# EAGLE board Top (EAGLE 6.3)
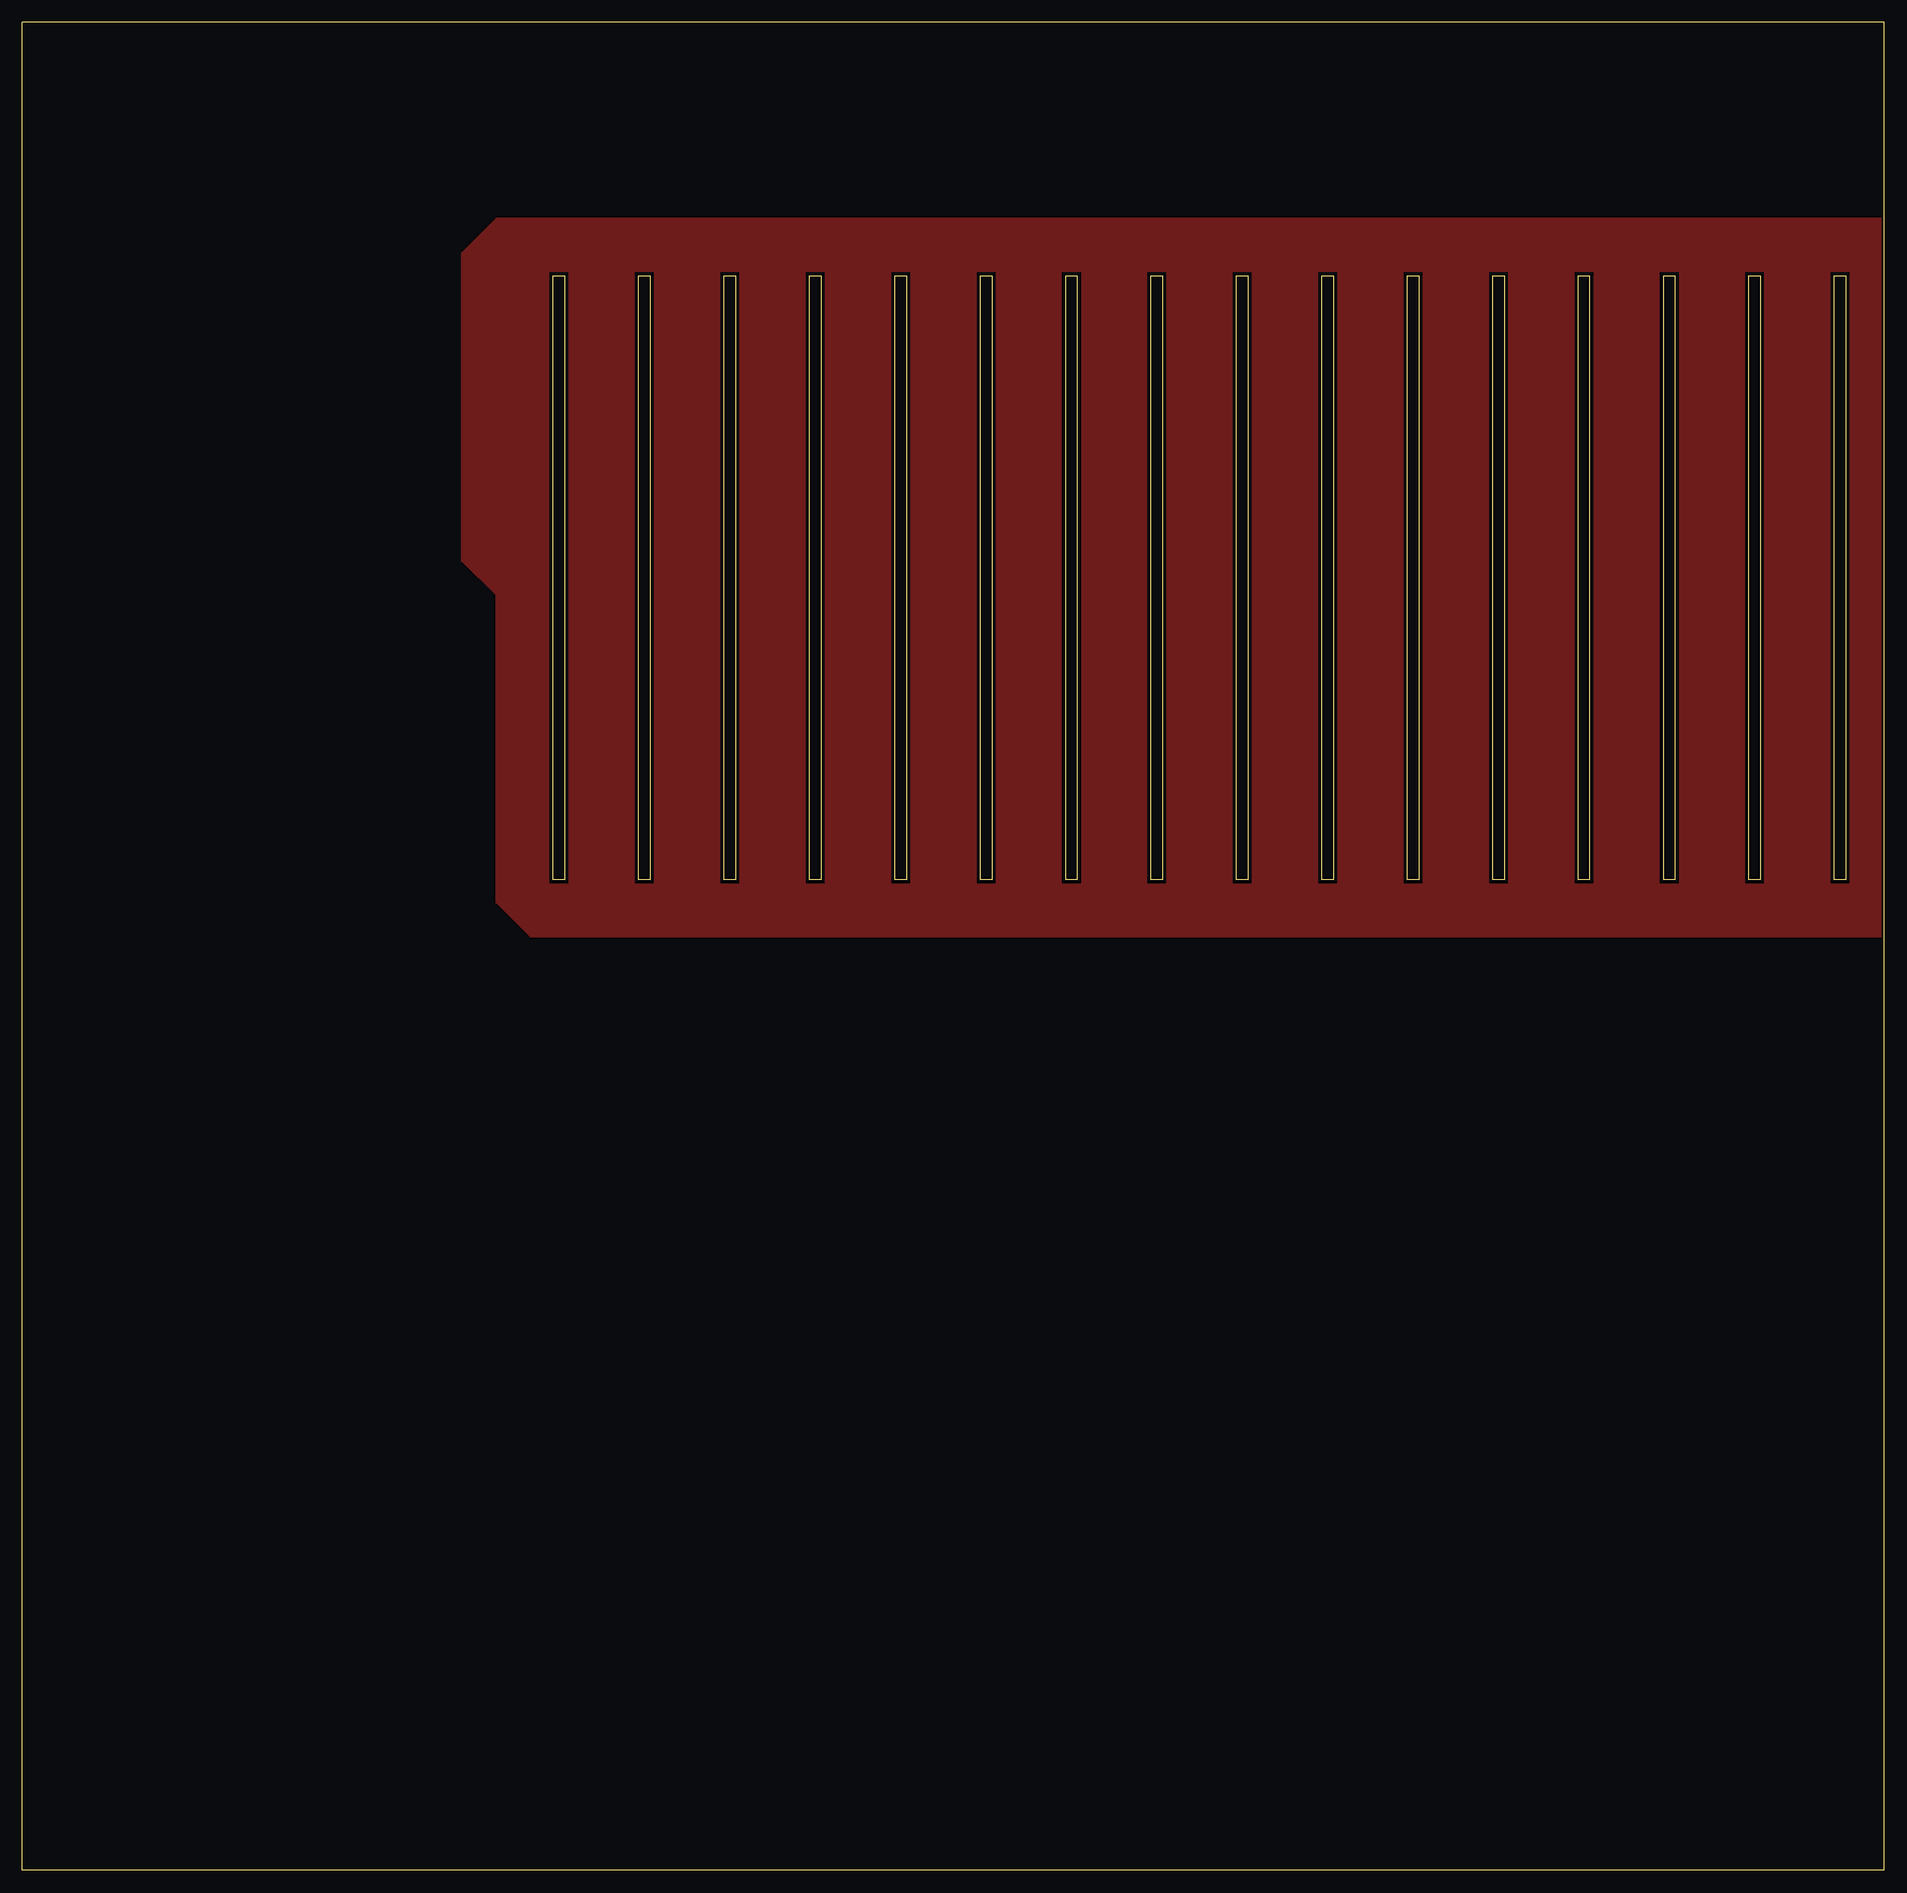
[diagram p0: board, top side]
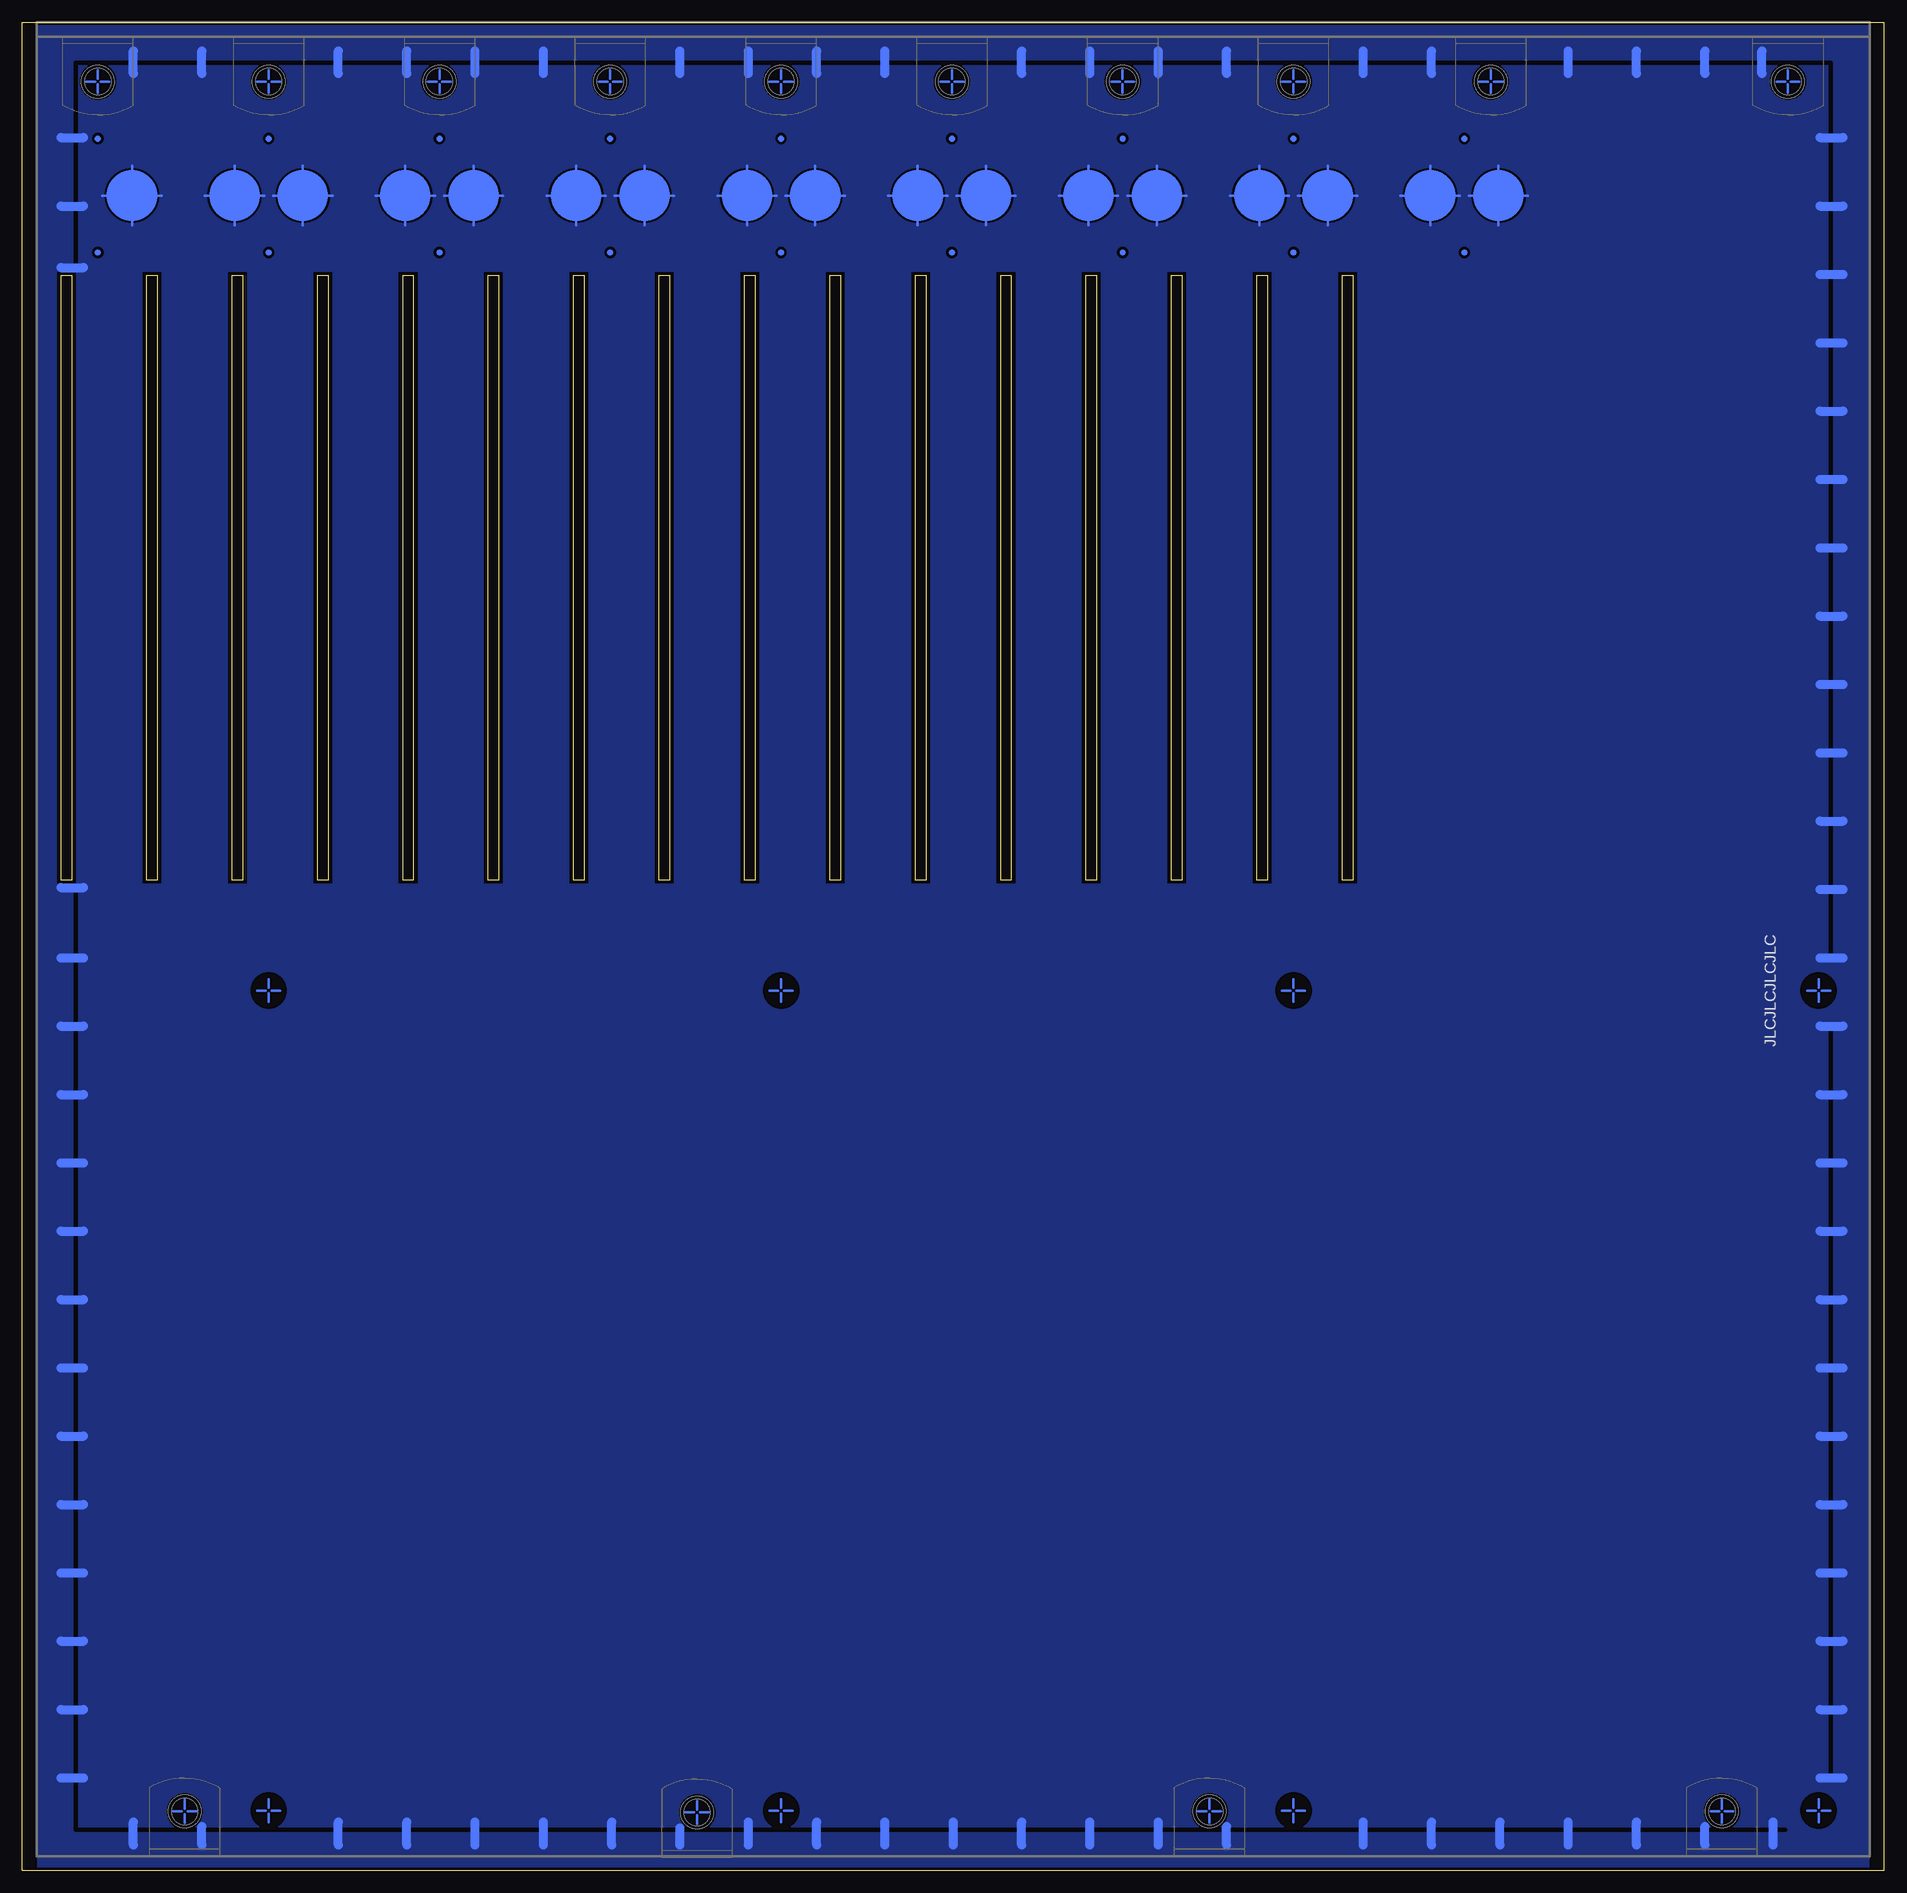
[diagram p1: board, bottom side, seen from below]

Size 207.65 x 206.06 mm. Coordinates in mm from the lower left corner, seen from the top.
Outline: 207.65,0 0,0 0,206.06 207.65,206.06 207.65,0
Outline: 59.21,177.8 60.48,177.8 60.48,110.49 59.21,110.49 59.21,177.8
Outline: 68.74,177.8 70.01,177.8 70.01,110.49 68.74,110.49 68.74,177.8
Outline: 78.26,177.8 79.53,177.8 79.53,110.49 78.26,110.49 78.26,177.8
Outline: 87.79,177.8 89.06,177.8 89.06,110.49 87.79,110.49 87.79,177.8
Outline: 97.31,177.8 98.58,177.8 98.58,110.49 97.31,110.49 97.31,177.8
Outline: 106.84,177.8 108.11,177.8 108.11,110.49 106.84,110.49 106.84,177.8
Outline: 116.36,177.8 117.63,177.8 117.63,110.49 116.36,110.49 116.36,177.8
Outline: 125.89,177.8 127.16,177.8 127.16,110.49 125.89,110.49 125.89,177.8
Outline: 135.41,177.8 136.68,177.8 136.68,110.49 135.41,110.49 135.41,177.8
Outline: 144.94,177.8 146.21,177.8 146.21,110.49 144.94,110.49 144.94,177.8
Outline: 154.46,177.8 155.73,177.8 155.73,110.49 154.46,110.49 154.46,177.8
Outline: 163.99,177.8 165.26,177.8 165.26,110.49 163.99,110.49 163.99,177.8
Outline: 173.51,177.8 174.78,177.8 174.78,110.49 173.51,110.49 173.51,177.8
Outline: 183.04,177.8 184.31,177.8 184.31,110.49 183.04,110.49 183.04,177.8
Outline: 192.56,177.8 193.83,177.8 193.83,110.49 192.56,110.49 192.56,177.8
Outline: 202.09,177.8 203.36,177.8 203.36,110.49 202.09,110.49 202.09,177.8
Copper layers (1*16): Top 0.035mm / dielectric 1.5mm / Bottom 0.035mm
Design rules "JLCPCB Custom": minimum track width 5mil, minimum drill 0.3mm, track to track 5mil, track to pad 8mil, pad to pad 8mil, via to via 8mil, smd to smd 5mil, copper to edge 0.3mm, drill to drill 0.3mm, minimum pad ring 10mil, minimum via ring 8mil, stop-mask expansion 0mil, vias tented up to drill 25mil, thermal gap 10mil
tRestrict: area 58.8,110.1 to 60.9,178.2; area 68.3,110.1 to 70.4,178.2; area 77.9,110.1 to 79.9,178.2; area 87.4,110.1 to 89.5,178.2; area 96.9,110.1 to 99,178.2; area 106.4,110.1 to 108.5,178.2; area 116,110.1 to 118,178.2; area 125.5,110.1 to 127.6,178.2; area 135,110.1 to 137.1,178.2; area 144.5,110.1 to 146.6,178.2; area 154.1,110.1 to 156.1,178.2; area 163.6,110.1 to 165.7,178.2; area 173.1,110.1 to 175.2,178.2; area 182.6,110.1 to 184.7,178.2; area 192.2,110.1 to 194.2,178.2; area 201.7,110.1 to 203.8,178.2
bRestrict: area 5.3,96.1 to 9.3,100.1; area 63.8,96.1 to 67.9,100.1; area 121,96.1 to 125.1,100.1; area 178.1,96.1 to 182.2,100.1; area 178.1,4.6 to 182.2,8.7; area 121,4.6 to 125.1,8.7; area 63.8,4.6 to 67.9,8.7; area 5.3,4.6 to 9.3,8.7; area 73.2,4.6 to 77.3,8.6; area 130.4,4.4 to 134.4,8.5; area 187.5,4.6 to 191.6,8.6; area 16.1,4.6 to 20.1,8.6; area 8.7,197.4 to 12.8,201.5; area 41.8,197.4 to 45.9,201.5; area 46.2,179.8 to 47.5,181; area 46.2,192.5 to 47.5,193.7; area 65.2,179.8 to 66.5,181; area 65.2,192.5 to 66.5,193.7; area 84.3,179.8 to 85.6,181; area 84.3,192.5 to 85.6,193.7; area 103.3,179.8 to 104.6,181; area 103.3,192.5 to 104.6,193.7; area 122.4,179.8 to 123.7,181; area 122.4,192.5 to 123.7,193.7; area 141.4,179.8 to 142.7,181; area 141.4,192.5 to 142.7,193.7; area 160.5,179.8 to 161.8,181; area 160.5,192.5 to 161.8,193.7; area 179.5,179.8 to 180.8,181; area 179.5,192.5 to 180.8,193.7; area 198.6,179.8 to 199.9,181; area 198.6,192.5 to 199.9,193.7; area 63.8,197.4 to 67.9,201.5; area 82.9,197.4 to 87,201.5; area 101.9,197.4 to 106,201.5; area 121,197.4 to 125.1,201.5; area 140,197.4 to 144.1,201.5; area 159.1,197.4 to 163.2,201.5; area 178.1,197.4 to 182.2,201.5; area 197.2,197.4 to 201.3,201.5; area 40,183.7 to 46.1,189.8; area 47.6,183.7 to 53.7,189.8; area 59,183.7 to 65.1,189.8; area 66.6,183.7 to 72.7,189.8; area 78.1,183.7 to 84.2,189.8; area 85.7,183.7 to 91.8,189.8; area 97.1,183.7 to 103.2,189.8; area 104.7,183.7 to 110.8,189.8; area 116.2,183.7 to 122.3,189.8; area 123.8,183.7 to 129.9,189.8; area 135.2,183.7 to 141.3,189.8; area 142.8,183.7 to 148.9,189.8; area 154.3,183.7 to 160.4,189.8; area 161.9,183.7 to 168,189.8; area 173.3,183.7 to 179.4,189.8; area 180.9,183.7 to 187,189.8; area 192.4,183.7 to 198.5,189.8; area 58.8,110.1 to 60.9,178.2; area 68.3,110.1 to 70.4,178.2; area 77.9,110.1 to 79.9,178.2; area 87.4,110.1 to 89.5,178.2; area 96.9,110.1 to 99,178.2; area 106.4,110.1 to 108.5,178.2; area 116,110.1 to 118,178.2; area 125.5,110.1 to 127.6,178.2; area 135,110.1 to 137.1,178.2; area 144.5,110.1 to 146.6,178.2; area 154.1,110.1 to 156.1,178.2; area 163.6,110.1 to 165.7,178.2; area 173.1,110.1 to 175.2,178.2; area 182.6,110.1 to 184.7,178.2; area 192.2,110.1 to 194.2,178.2; area 201.7,110.1 to 203.8,178.2; 6 lines

## Placement (x,y rotation side)
E$18  [614-TN]  43.88,204.47 180 bottom
E$20  [614-TN]  10.73,204.47 180 bottom
E$21  [614-TN]  18.1,1.59 0 bottom
E$22  [614-TN]  75.25,1.59 0 bottom
E$23  [614-TN]  132.4,1.46 0 bottom
E$24  [614-TN]  189.55,1.59 0 bottom
E$25  [614-TN]  65.88,204.47 180 bottom
E$26  [614-TN]  84.93,204.47 180 bottom
E$27  [614-TN]  103.98,204.47 180 bottom
E$28  [614-TN]  123.03,204.47 180 bottom
E$29  [614-TN]  142.08,204.47 180 bottom
E$30  [614-TN]  161.13,204.47 180 bottom
E$31  [614-TN]  180.18,204.47 180 bottom
E$32  [614-TN]  199.23,204.47 180 bottom

## Library data of the parts
E$18 E$20-E$32 = panel

## Tracks (layer width: path | path; a pad name or v marks a point on that pad's centre or on a via)
S$3
  Bottom 0.254: 8.57,6.67 7.62,6.67
S$11
  Bottom 0.254: 6.03,6.67 6.99,6.67
S$12
  Bottom 0.254: 7.3,5.4 7.3,6.35
S$13
  Bottom 0.254: 7.3,7.94 7.3,6.99
S$14
  Bottom 0.254: 8.57,98.11 7.62,98.11
S$15
  Bottom 0.254: 6.03,98.11 6.99,98.11
S$16
  Bottom 0.254: 7.3,96.84 7.3,97.79
S$17
  Bottom 0.254: 7.3,99.38 7.3,98.42
S$18
  Bottom 0.254: 67.15,6.67 66.2,6.67
S$21
  Bottom 0.254: 64.61,6.67 65.56,6.67
S$22
  Bottom 0.254: 65.88,5.4 65.88,6.35
S$23
  Bottom 0.254: 65.88,7.94 65.88,6.99
S$24
  Bottom 0.254: 124.3,6.67 123.35,6.67
S$25
  Bottom 0.254: 121.76,6.67 122.71,6.67
S$26
  Bottom 0.254: 123.03,5.4 123.03,6.35
S$27
  Bottom 0.254: 123.03,7.94 123.03,6.99
S$28
  Bottom 0.254: 181.45,6.67 180.5,6.67
S$29
  Bottom 0.254: 178.91,6.67 179.86,6.67
S$30
  Bottom 0.254: 180.18,5.4 180.18,6.35
S$31
  Bottom 0.254: 180.18,7.94 180.18,6.99
S$32
  Bottom 0.254: 181.45,98.11 180.5,98.11
S$33
  Bottom 0.254: 178.91,98.11 179.86,98.11
S$34
  Bottom 0.254: 180.18,96.84 180.18,97.79
S$35
  Bottom 0.254: 180.18,99.38 180.18,98.42
S$47
  Bottom 0.254: 76.52,6.59 75.56,6.59
S$48
  Bottom 0.254: 73.98,6.59 74.93,6.59
S$49
  Bottom 0.254: 75.25,5.32 75.25,6.27
S$50
  Bottom 0.254: 75.25,7.86 75.25,6.91
S$51
  Bottom 0.254: 133.67,6.46 132.72,6.46
S$52
  Bottom 0.254: 131.13,6.46 132.08,6.46
S$59
  Bottom 0.254: 124.3,98.11 123.35,98.11
S$71
  Bottom 0.254: 121.76,98.11 122.71,98.11
S$72
  Bottom 0.254: 123.03,96.84 123.03,97.79
S$73
  Bottom 0.254: 123.03,99.38 123.03,98.42
S$74
  Bottom 0.254: 67.15,98.11 66.2,98.11
S$75
  Bottom 0.254: 64.61,98.11 65.56,98.11
S$76
  Bottom 0.254: 65.88,96.84 65.88,97.79
S$77
  Bottom 0.254: 65.88,99.38 65.88,98.42
S$78
  Bottom 0.254: 43.02,183.45 43.02,190.06 | 39.72,186.75 46.32,186.75 | 50.64,183.45 50.64,190.06 | 47.34,186.75 53.94,186.75 | 62.07,183.45 62.07,190.06 | 58.77,186.75 65.37,186.75 | 69.69,183.45 69.69,190.06 | 66.39,186.75 72.99,186.75 | 81.12,183.45 81.12,190.06 | 77.82,186.75 84.42,186.75 | 88.74,183.45 88.74,190.06 | 85.44,186.75 92.04,186.75 | 100.17,183.45 100.17,190.06 | 96.87,186.75 103.47,186.75 | 107.79,183.45 107.79,190.06 | 104.49,186.75 111.09,186.75 | 119.22,183.45 119.22,190.06 | 115.92,186.75 122.52,186.75 | 126.84,183.45 126.84,190.06 | 123.54,186.75 130.14,186.75 | 138.27,183.45 138.27,190.06 | 134.97,186.75 141.57,186.75 | 145.89,183.45 145.89,190.06 | 142.59,186.75 149.19,186.75 | 157.32,183.45 157.32,190.06 | 154.02,186.75 160.62,186.75 | 164.94,183.45 164.94,190.06 | 161.64,186.75 168.24,186.75 | 176.37,183.45 176.37,190.06 | 173.07,186.75 179.67,186.75 | 183.99,183.45 183.99,190.06 | 180.69,186.75 187.29,186.75 | 195.42,183.45 195.42,190.06 | 192.12,186.75 198.72,186.75
  Bottom 1.016: 203.36,33.18 200.82,33.18 | 203.36,25.56 200.82,25.56 | 203.36,17.94 200.82,17.94 | 203.36,56.04 200.82,56.04 | 203.36,48.42 200.82,48.42 | 203.36,40.8 200.82,40.8 | 203.36,78.9 200.82,78.9 | 203.36,71.28 200.82,71.28 | 203.36,63.66 200.82,63.66 | 203.36,10.32 200.82,10.32 | 203.36,101.76 200.82,101.76 | 203.36,94.14 200.82,94.14 | 203.36,86.52 200.82,86.52 | 203.36,193.2 200.82,193.2 | 35.24,200.34 35.24,202.88 | 27.62,200.34 27.62,202.88 | 20,200.34 20,202.88 | 58.1,200.34 58.1,202.88 | 50.48,200.34 50.48,202.88 | 80.96,200.34 80.96,202.88 | 73.34,200.34 73.34,202.88 | 13.65,200.34 13.65,202.88 | 96.2,200.34 96.2,202.88 | 88.58,200.34 88.58,202.88 | 126.68,200.34 126.68,202.88 | 119.06,200.34 119.06,202.88 | 111.44,200.34 111.44,202.88 | 149.54,200.34 149.54,202.88 | 134.3,200.34 134.3,202.88 | 172.4,200.34 172.4,202.88 | 164.78,200.34 164.78,202.88 | 157.16,200.34 157.16,202.88 | 195.26,200.34 195.26,202.88 | 187.64,200.34 187.64,202.88 | 7.14,33.18 4.6,33.18 | 7.14,25.56 4.6,25.56 | 7.14,17.94 4.6,17.94 | 7.14,56.04 4.6,56.04 | 7.14,48.42 4.6,48.42 | 7.14,40.8 4.6,40.8 | 7.14,78.9 4.6,78.9 | 7.14,71.28 4.6,71.28 | 7.14,63.66 4.6,63.66 | 7.14,10.32 4.6,10.32 | 7.14,101.76 4.6,101.76 | 7.14,94.14 4.6,94.14 | 7.14,86.52 4.6,86.52 | 7.14,124.62 4.6,124.62 | 7.14,117 4.6,117 | 7.14,109.38 4.6,109.38 | 7.14,147.48 4.6,147.48 | 7.14,139.86 4.6,139.86 | 7.14,132.24 4.6,132.24 | 7.14,170.34 4.6,170.34 | 7.14,162.72 4.6,162.72 | 7.14,155.1 4.6,155.1 | 7.14,193.2 4.6,193.2 | 7.14,185.58 4.6,185.58 | 7.14,177.96 4.6,177.96 | 35.24,2.86 35.24,5.4 | 27.62,2.86 27.62,5.4 | 20,2.86 20,4.89 | 58.1,2.86 58.1,5.4 | 50.48,2.86 50.48,5.4 | 42.86,2.86 42.86,5.4 | 80.96,2.86 80.96,5.4 | 73.34,2.86 73.34,4.89
  Bottom 1.016: 12.38,2.86 12.38,5.4 | 103.82,2.86 103.82,5.4 | 96.2,2.86 96.2,5.4 | 88.58,2.86 88.58,5.4 | 126.68,2.86 126.68,5.4 | 119.06,2.86 119.06,5.4 | 111.44,2.86 111.44,5.4 | 149.54,2.86 149.54,5.4 | 141.92,2.86 141.92,5.4 | 134.3,2.86 134.3,4.76 | 172.4,2.86 172.4,5.4 | 164.78,2.86 164.78,5.4 | 157.16,2.86 157.16,5.4 | 195.26,2.86 195.26,5.4 | 187.64,2.86 187.64,4.89 | 203.36,109.58 200.82,109.58 | 203.36,178.71 200.82,178.71 | 203.36,185.58 200.82,185.58
  pour Bottom: 1.78,0.43 205.87,0.43 205.87,205.63 1.78,205.63
S$82
  Bottom 0.254: 132.4,5.19 132.4,6.15
S$83
  Bottom 0.254: 132.4,7.73 132.4,6.78
S$84
  Bottom 0.254: 190.82,6.59 189.87,6.59
S$85
  Bottom 0.254: 188.28,6.59 189.23,6.59
S$86
  Bottom 0.254: 189.55,5.32 189.55,6.27
S$87
  Bottom 0.254: 189.55,7.86 189.55,6.91
S$88
  Bottom 0.254: 19.37,6.59 18.41,6.59
S$89
  Bottom 0.254: 16.83,6.59 17.78,6.59
S$90
  Bottom 0.254: 18.1,5.32 18.1,6.27
S$91
  Bottom 0.254: 18.1,7.86 18.1,6.91
S$98
  Bottom 0.254: 9.46,199.47 10.41,199.47
S$99
  Bottom 0.254: 12,199.47 11.05,199.47
S$100
  Bottom 0.254: 10.73,200.74 10.73,199.78
S$101
  Bottom 0.254: 10.73,198.2 10.73,199.15
S$103
  Bottom 0.254: 42.61,199.47 43.56,199.47
S$105
  Bottom 0.254: 45.15,199.47 44.2,199.47
S$106
  Bottom 0.254: 43.88,200.74 43.88,199.78
S$107
  Bottom 0.254: 43.88,198.2 43.88,199.15
S$109
  Bottom 0.254: 64.61,199.47 65.56,199.47
S$158
  Bottom 0.254: 67.15,199.47 66.2,199.47
S$159
  Bottom 0.254: 65.88,200.74 65.88,199.78
S$160
  Bottom 0.254: 65.88,198.2 65.88,199.15
S$165
  Bottom 0.254: 83.66,199.47 84.61,199.47
S$166
  Bottom 0.254: 86.2,199.47 85.25,199.47
S$167
  Bottom 0.254: 84.93,200.74 84.93,199.78
S$168
  Bottom 0.254: 84.93,198.2 84.93,199.15
S$169
  Bottom 0.254: 102.71,199.47 103.66,199.47
S$170
  Bottom 0.254: 105.25,199.47 104.3,199.47
S$171
  Bottom 0.254: 103.98,200.74 103.98,199.78
S$172
  Bottom 0.254: 103.98,198.2 103.98,199.15
S$173
  Bottom 0.254: 121.76,199.47 122.71,199.47
S$174
  Bottom 0.254: 124.3,199.47 123.35,199.47
S$175
  Bottom 0.254: 123.03,200.74 123.03,199.78
S$176
  Bottom 0.254: 123.03,198.2 123.03,199.15
S$177
  Bottom 0.254: 140.81,199.47 141.76,199.47
S$178
  Bottom 0.254: 143.35,199.47 142.4,199.47
S$179
  Bottom 0.254: 142.08,200.74 142.08,199.78
S$180
  Bottom 0.254: 142.08,198.2 142.08,199.15
S$181
  Bottom 0.254: 159.86,199.47 160.81,199.47
S$182
  Bottom 0.254: 162.4,199.47 161.45,199.47
S$183
  Bottom 0.254: 161.13,200.74 161.13,199.78
S$184
  Bottom 0.254: 161.13,198.2 161.13,199.15
S$185
  Bottom 0.254: 178.91,199.47 179.86,199.47
S$186
  Bottom 0.254: 181.45,199.47 180.5,199.47
S$187
  Bottom 0.254: 180.18,200.74 180.18,199.78
S$188
  Bottom 0.254: 180.18,198.2 180.18,199.15
S$189
  Bottom 0.254: 197.96,199.47 198.91,199.47
S$190
  Bottom 0.254: 200.5,199.47 199.55,199.47
S$191
  Bottom 0.254: 199.23,200.74 199.23,199.78
S$192
  Bottom 0.254: 199.23,198.2 199.23,199.15
S$327
  pour Top: 52.86,107.95 56.67,104.14 207.65,104.14 207.65,184.15 52.86,184.15 49.05,180.34 49.05,146.05 52.86,142.24
(copper drawn outside any net)
  shapes: Bottom circle x35

## Text on the board
bPlace: JLCJLCJLCJLC